# Altium PCB smartbox.PcbDoc
Units mm, origin at the board's own origin, x right, y up, seen from the top; angles counter-clockwise.
Board outline 93 x 55 mm, 2 copper layers (Top Layer, Bottom Layer); 91 components, 68 nets, 355 pads, 255 vias.
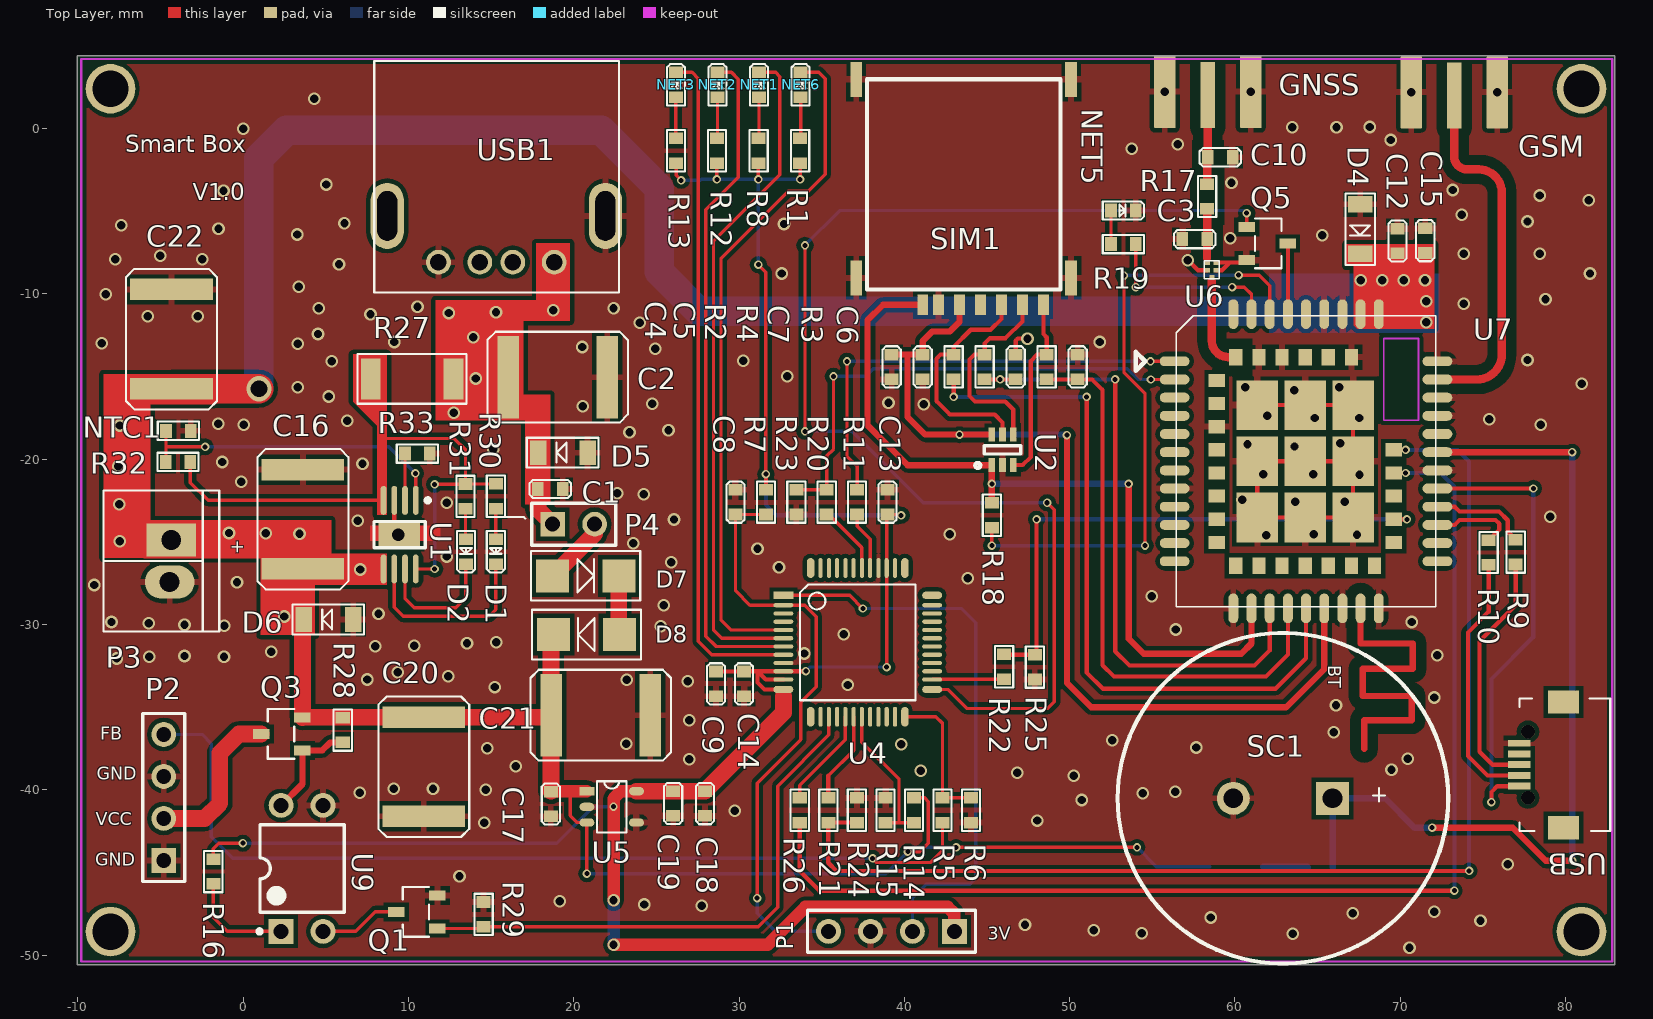
[diagram p0: Top Layer view]
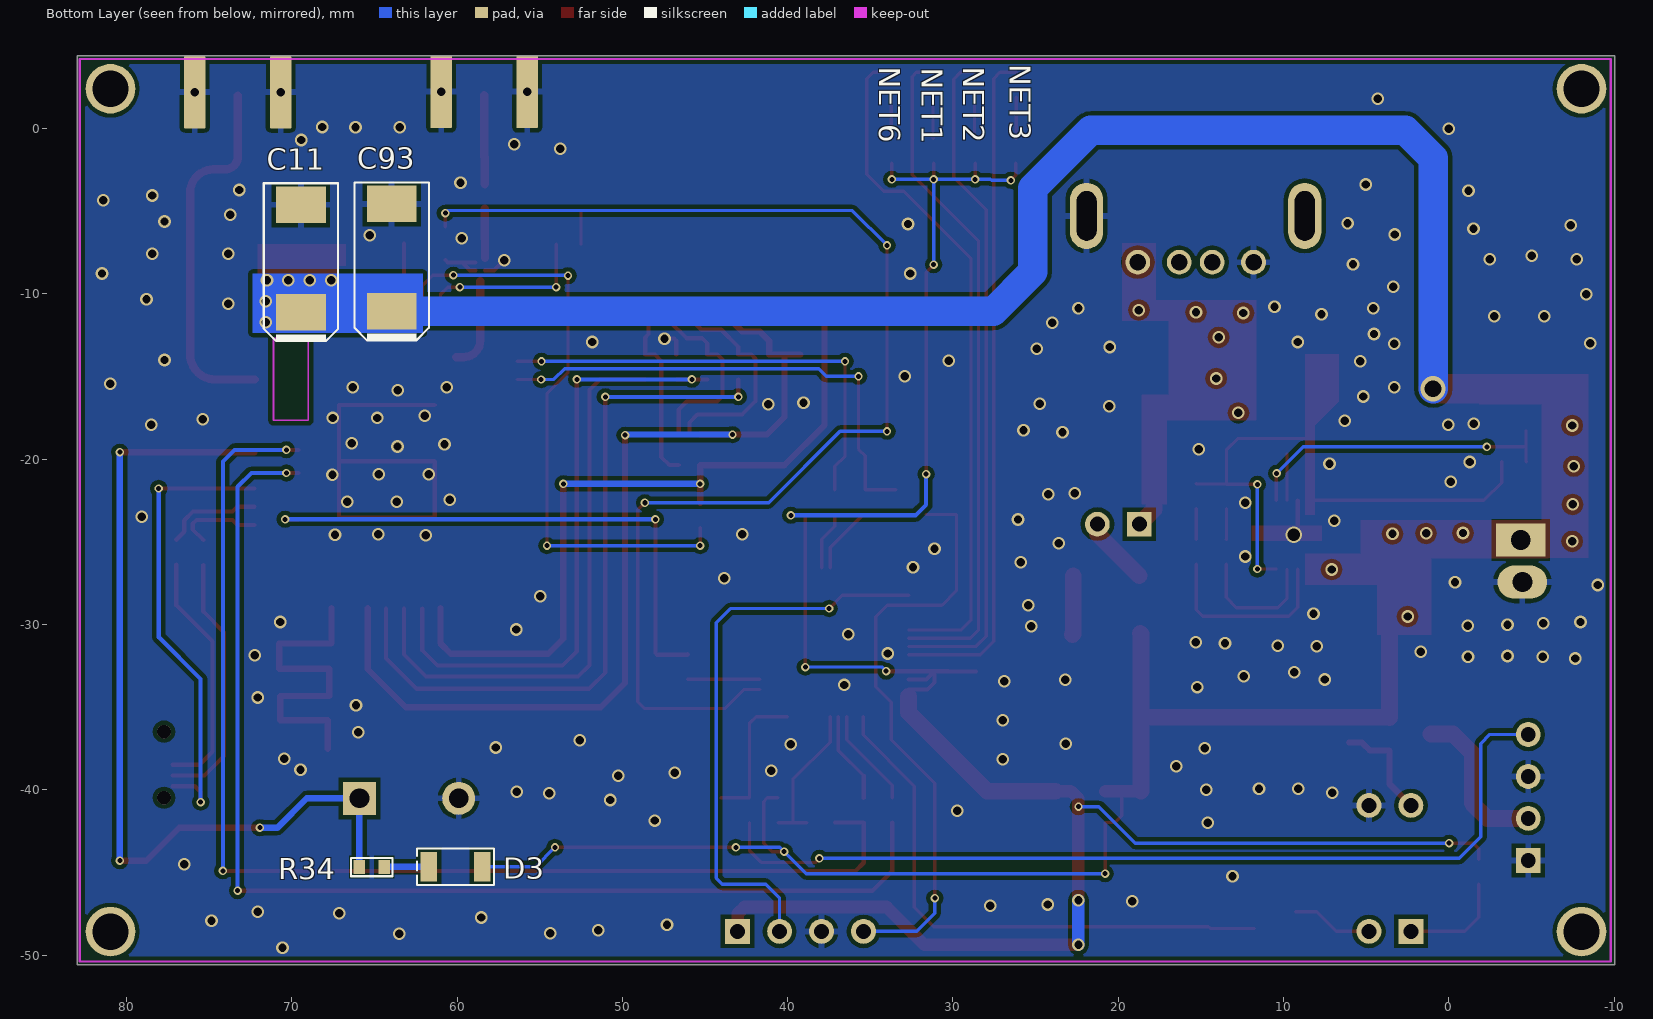
[diagram p1: Bottom Layer view, seen from below]

## Layer stack, top to bottom
Top Layer: signal copper 0.0356
Dielectric: dielectric 0.32, FR-4, Dk 4.8
Bottom Layer: signal copper 0.0356

## Board outline
-10.033,-50.58 82.967,-50.58 82.967,4.42 -10.033,4.42

## Design rules (kind name [scope] priority, off if disabled: settings)
Clearance GND [All vs InNetClass('RF')] p1: gap=0.635
Clearance [All] p2: gap=0.254
DiffPairsRouting [All] p1: maxlimit=0.254 minlimit=0.254 mostfreqgap=0.254 maxuncoupledlength=12.7
PolygonConnect [All] p1: connectstyle=Relief reliefconductorwidth=0.381 reliefentries=4 polygonreliefangle="90 Angle"
RoutingVias [All] p1: holewidth=0.711 width=1.27 viastyle="Through Hole" minholewidth=0.711 minwidth=1.27 maxholewidth=0.711 maxwidth=1.27
SilkscreenOverComponentPads [All] p1: minsilkscreentomaskgap=0.025
SolderMaskExpansion [All] p1: expansion=0.102
Width [All] p1: maxlimit=5.08 minlimit=0.203 preferedwidth=0.254
26 further rules are at their usual default settings.

## Classes and differential pairs
net class RF: BT_ANT GSM_ANT NetC3_1 NetC10_1 NetU6_1
component class CPU: C8 C9 C13 C14 NET1 NET2 NET3 NET6 P1 R1 R5 R6 R7 R8 R12 R13 R14 R15 U4
component class GSM: C3 C4 C5 C6 C7 C10 C11 C12 C15 C93 D3 D4 GNSS GSM NET5 Q5 R2 R3 R4 R9 R10 R11 R17 R18 R19 R20 R21 R22 R23 R24 R25 R26 R34 SC1 SIM1 U2 U6 U7 USB
component class POWER: C1 C2 C16 C17 C18 C19 C20 C21 C22 D1 D2 D5 D6 D7 D8 J1 NTC1 P2 P3 P4 Q1 Q3 R16 R27 R28 R29 R30 R31 R32 R33 U1 U5 U9 USB1
differential pair D: +D_P -D_N

## Components (designator, comment, footprint, x,y, rotation, side; value= is the part's Value field where it differs from the comment)
C1 "0.1uF/10V" 0603C 19.329,-21.793 r180 top
C2 "47uF/10V" 2220C 22.022,-15.037 r180 top
C3 "NC" 0603C 58.318,-6.68 r180 top
C4 "220nF/10V" 0603C 39.232,-15.165 r90 top
C5 "33pF/10V" 0603C 41.107,-15.165 r90 top
C6 "22pF/10V" 0603C 50.484,-15.165 r90 top
C7 "22pF/10V" 0603C 46.733,-15.165 r90 top
C8 "0.1uF/10V" 0603C 29.783,-23.343 r90 top
C9 "0.1uF/10V" 0603C 28.6,-32.842 r270 top
C10 "NC" 0603C 58.358,-1.727 r0 top
C11 "1000uF/6.3V" 7343 69.444,-11.1 r90 bottom
C12 "33pF/10V" 0603C 69.839,-7.544 r90 top
C13 "0.1uF/10V" 0603C 38.978,-23.343 r90 top
C14 "10uF/10V" 0603C 30.291,-34.341 r90 top
C15 "10pF/10V" 0603C 71.515,-7.518 r90 top
C16 "47uF/10V" 2220C 3.607,-20.625 r270 top
C17 "0.1uF/10V" 0603C 18.607,-40.107 r270 top
C18 "0.1uF/10V" 0603C 27.94,-40.081 r270 top
C19 "10uF/10V" 0603C 26.01,-41.58 r90 top
C20 "47uF/10V" 2220C 10.922,-41.605 r90 top
C21 "47uF/10V" 2220C 24.627,-35.484 r180 top
C22 "47uF/10V" 2220C -4.343,-9.728 r270 top
C93 "1000uF/6.3V" 7343 63.957,-11.049 r90 bottom
D1 "" 0603LED 15.28,-24.841 r270 top
D2 "" 0603LED 13.471,-24.85 r270 top
D3 "1N4148" LL34 58.471,-44.653 r0 bottom
D4 "MMSZ5231BT1G" SOD123 67.578,-4.572 r270 top
D5 "MMSZ5231BT1G" SOD123 20.835,-19.6 r180 top
D6 "MMSZ5231BT1G" SOD123 6.655,-29.693 r180 top
D7 "SS24" SMA 18.72,-27.051 r0 top
D8 "SS24" SMA 22.758,-30.607 r180 top
GNSS "SMA/142-0711-821" "SMA END LAUNCH JACK RECEPTACLE SHORT" 58.358,2.032 r0 top
GSM "SMA/142-0711-821" "SMA END LAUNCH JACK RECEPTACLE SHORT" 73.268,2.007 r0 top
NET1 "LED" 0603LED 31.205,1.905 r90 top
NET2 "LED" 0603LED 28.691,1.905 r90 top
NET3 "LED" 0603LED 26.176,1.905 r90 top
NET5 "LED" 0603LED 52.502,-4.953 r0 top
NET6 "LED" 0603LED 33.72,1.905 r90 top
NTC1 "SDN1608X103F3950FTF" 0603R -4.674,-18.277 r0 top
P1 "Header 4" HDR1X4 43.028,-48.565 r180 top
P2 "Header 4" HDR1X4 -4.812,-44.272 r90 top
P3 "Header 2" 2X2.54MMZ -4.355,-24.892 r270 top
P4 "JUMPER" HDR1X2 18.72,-23.927 r0 top
Q1 "S8050" SOT23-3 11.749,-48.387 r0 top
Q3 "SI2343" SOT23-3 3.581,-37.617 r0 top
Q5 "S8050" SOT23-3 60.706,-5.944 r180 top
R1 "1K" 0603r 33.695,-0.584 r270 top
R2 "10R/5%" 0603R 42.983,-13.665 r270 top
R3 "10R/5%" 0603R 48.609,-13.665 r270 top
R4 "10R/5%" 0603R 44.858,-13.665 r270 top
R5 "20K" 0603R 42.305,-41.986 r90 top
R6 "130K" 0603R 44.032,-40.486 r270 top
R7 "10K" 0603R 31.622,-23.343 r90 top
R8 "1K" 0603r 31.18,-0.584 r270 top
R9 "10R/5%" 0603R 76.987,-24.867 r270 top
R10 "10R/5%" 0603R 75.351,-24.892 r270 top
R11 "1K" 0603R 37.139,-21.843 r270 top
R12 "1K" 0603r 28.665,-0.584 r270 top
R13 "1K" 0603r 26.187,-0.584 r270 top
R14 "10K" 0603R 40.578,-40.486 r270 top
R15 "10K" 0603R 38.851,-41.986 r90 top
R16 "10K" 0603R -1.815,-45.695 r90 top
R17 "0" 0603R 58.318,-4.851 r90 top
R18 "10K" 0603R 45.288,-22.631 r270 top
R19 "1K" 0603r 52.502,-6.985 r0 top
R20 "10K" 0603R 35.3,-23.343 r90 top
R21 "10K" 0603R 35.396,-40.486 r270 top
R22 "10K" 0603R 46.039,-33.299 r90 top
R23 "140K" 0603R 33.461,-21.843 r270 top
R24 "140K" 0603R 37.124,-41.986 r90 top
R25 "140K" 0603R 47.893,-31.826 r270 top
R26 "1K" 0603R 33.669,-41.986 r90 top
R27 "0.4/3/4W" 2010R 12.714,-15.138 r180 top
R28 "10K" 0603R 6.02,-37.135 r90 top
R29 "10K" 0603R 14.543,-46.787 r270 top
R30 "1K" 0603R 15.28,-22.987 r90 top
R31 "1K" 0603R 13.445,-22.995 r90 top
R32 "5.7K/1%" 0603R -3.2,-20.156 r180 top
R33 "2K/1%" 0603R 11.284,-19.66 r180 top
R34 "10R/5%" 0603r 65.913,-44.679 r180 bottom
SC1 "4.7F/5.5V" SF-13.5*6.5 65.902,-40.513 r180 top
SIM1 "nano sim" "Nano SIM" 41.111,-10.643 r180 top
U1 "TP4056-42-MSOP8-PP" SOP65P490X265-8N 9.463,-24.562 r270 top
U2 "SMF05C" SC70-6L 45.937,-19.431 r90 top
U4 "STM8L151C8T6" TQFP-48 32.679,-28.829 r0 top
U5 "TLV70230DBVR" SOT23-5(DBV) 20.791,-40.081 r0 top
U6 "SAFFB1G56KB0F0A" SAFFB1G56KB0F0A 58.598,-8.992 r90 top
U7 "SIM868E/SIM68" SIM868 56.351,-14.072 r0 top
U9 "TL181" DIP-4 3.556,-44.755 r90 top
USB "Header 5" Micro_USB_PH 77.205,-38.481 r180 top
USB1 "Header 5" USB-A 18.81,-8.077 r180 top

## Footprints (in the part's own frame and the unit in brackets; to place one, negate y for a bottom-side part, rotate by r counter-clockwise, add the part's x,y. Pads: shape width x height; smd on the part's side, far side on the other; paste and mask are expansions set on the pad)
2X2.54MMZ [mm]
  rect 2x3 hole 1.2: 1(0,0)
  oval 2x3 hole 1.2: 2(2.54,-0.1)
  silkscreen extent -3,-4.1 5.54,2.9
0603C [mm]
  rect 0.7x0.85 smd: 1(0,0) 2(1.5,0)
  silkscreen extent -0.5,-0.55 2,0.55
0603LED [mm]
  rect 0.7x0.85 smd: 1(0,0) 2(1.5,0)
  silkscreen extent -0.5,-0.55 2,0.55
0603R [mm]
  rect 0.7x0.85 smd: 1(0,0) 2(1.5,0)
  silkscreen extent -0.5,-0.55 2,0.55
0603r [mm]
  rect 0.7x0.85 smd: 1(0,0) 2(1.5,0)
  silkscreen extent -0.5,-0.55 2,0.55
2010R [mm]
  rect 1.2x2.5 smd: 1(0,0) 2(5,0)
  silkscreen extent -0.8,-1.5 5.8,1.5
2220C [mm] "C"
  rect 1.3x5 smd: 1(0,0) 2(6,0)
  silkscreen extent -1.25,-2.75 7.25,2.75
7343 [mm]
  rect 2.2x3 smd: 1(0,0) 2(6.5,0)
  silkscreen extent -1.75,-2.25 7.8,2.25
DIP-4 [mm] "DIP; 4 Leads; Row Spacing 7.62 mm; Pitch 2.54 mm"
  rect 1.5x1.5 hole 0.9: 1(-3.81,1.27)
  round 1.5 hole 0.9: 2(-3.81,-1.27) 3(3.81,-1.27) 4(3.81,1.27)
  silkscreen extent -3.93,-2.55 2.65,2.69, body extent -3.15,-2.5 3.15,2.5, height 5.6
HDR1X2 [mm] "Connector; Header; 2 Position"
  rect 1.5x1.5 hole 0.9: 1(0,0)
  round 1.5 hole 0.9: 2(2.54,0)
  silkscreen extent -1.27,-1.27 3.81,1.27
HDR1X4 [mm] "Connector; Header; 4 Position"
  rect 1.5x1.5 hole 0.9: 1(0,0)
  round 1.5 hole 0.9: 2(2.54,0) 3(5.08,0) 4(7.62,0)
  silkscreen extent -1.27,-1.27 8.89,1.27
LL34 [mm]
  rect 1x1.8 smd: 1(0,0) 2(3.25,0)
  silkscreen extent -0.7,-1.1 3.96,1.1
Micro_USB_PH [mm]
  rect 1.35x0.42 smd: 1(0,1.3) 2(0,0.65) 3(0,0) 4(0,-0.65) 5(0,-1.3)
  rect 1.9x1.4 smd: 6(-2.675,3.811) 9(-2.675,-3.789)
  round 0.82 hole 0.82 unplated: 7(-0.525,2) 8(-0.525,-2)
  silkscreen extent -5.5,-4 0,4.01
"Nano SIM" [mm]
  rect 0.7x2.1 smd: 0(-8.97,-1.615) 0(-8.97,-13.615) 0(4.02,-1.615) 0(4.02,-13.615)
  rect 0.65x1.23 smd: 1(-2.22,0) 2(-4.76,0) 3(-7.3,0) 5(-0.95,0) 6(-3.49,0) 7(-6.03,0) 8(0,0)
  silkscreen extent -8.33,-13.64 3.38,-0.91
SAFFB1G56KB0F0A [mm]
  rect 0.3x0.3 smd: 1(0,0)
  rect 0.25x0.35 smd: 2(0.425,-0.288) 5(0.425,0.288)
  rect 0.3x0.35 smd: 3(0.9,-0.288) 4(0.9,0.288)
  silkscreen extent -0.1,-0.44 1,0.46
SC70-6L [mm]
  rect 0.85x0.4 smd: 1(-0.925,0.65) 2(-0.925,0) 3(-0.925,-0.65) 4(0.925,-0.65) 5(0.925,0) 6(0.925,0.65)
  silkscreen extent -1.09,-1.1 0.25,1.65
SF-13.5*6.5 [mm]
  rect 2x2 hole 1.2: 1(0,0)
  round 2 hole 1.2: 2(6,0)
  silkscreen extent -7,-10 13,10
SIM868 [mm]
  oval 1.8x0.6 smd: 1(0,0) 2(0,-1.1) 3(0,-2.2) 4(0,-3.3) 5(0,-4.4) 6(0,-5.5) 7(0,-6.6) 8(0,-7.7) 9(0,-8.8) 10(0,-9.9) 11(0,-11) 12(0,-12.1) 22(15.9,-12.1) 23(15.9,-11) 24(15.9,-9.9) 25(15.9,-8.8) 26(15.9,-7.7) 27(15.9,-6.6) 28(15.9,-5.5) 29(15.9,-4.4) 30(15.9,-3.3) 31(15.9,-2.2) 32(15.9,-1.1) 33(15.9,0)
  oval 0.6x1.8 smd: 13(3.55,-14.95) 14(4.65,-14.95) 15(5.75,-14.95) 16(6.85,-14.95) 17(7.95,-14.95) 18(9.05,-14.95) 19(10.15,-14.95) 20(11.25,-14.95) 21(12.35,-14.95) 34(12.35,2.85) 35(11.25,2.85) 36(10.15,2.85) 37(9.05,2.85) 38(7.95,2.85) 39(6.85,2.85) 40(5.75,2.85) 41(4.65,2.85) 42(3.55,2.85)
  rect 1x0.8 smd: 43(2.549,-1.159) 44(2.549,-2.559) 45(2.549,-3.959) 46(2.549,-5.359) 47(2.549,-6.759) 48(2.549,-8.159) 49(2.549,-9.559) 50(2.549,-10.959) 58(13.251,-10.959) 59(13.251,-9.559) 60(13.251,-8.159) 61(13.251,-6.759) 62(13.251,-5.359)
  rect 0.8x1 smd: 51(3.7,-12.359) 52(5.1,-12.359) 53(6.5,-12.359) 54(7.9,-12.359) 55(9.3,-12.359) 56(10.7,-12.359) 57(12.1,-12.359) 63(10.7,0.25) 64(9.3,0.25) 65(7.9,0.25) 66(6.5,0.25) 67(5.1,0.25) 68(3.7,0.25)
  rect 2.5x3 smd: 69(5,-2.65) 70(5,-6.05) 71(5,-9.45) 72(7.9,-9.45) 73(10.8,-9.45) 74(10.8,-6.05) 75(10.8,-2.65) 76(7.9,-2.65) 77(7.9,-6.05)
  Keep-Out Layer lines w0.102: 12.65,-3.57 12.65,1.38 14.75,1.38 14.75,-3.57 12.65,-3.57
  silkscreen extent -2.35,-14.85 15.8,2.75
SMA [mm]
  rect 2x2 smd: 1(0,0) 2(4,0)
  silkscreen extent -1.3,-1.5 5.3,1.5
"SMA END LAUNCH JACK RECEPTACLE SHORT" [mm] "SMA Connector - End Launch Jack Receptacle - Short"
  rrect10% 0.9x4 smd paste+0 mask+0.05: 1(0,0)
  rrect10% 1.3x4.4 hole 0.5 mask+0.05: 2(-2.6,0.2) 2(2.6,0.2)
  body extent -0.5,-2.05 0.5,2.05, height 8
SOD123 [mm]
  rect 1x1.5 smd: A(0,0) K(3,0)
  silkscreen extent -0.65,-0.9 3.68,0.9
SOP65P490X265-8N [mm] "SOP, 8-Leads, Body 3.1x3.1mm (max), Pitch 0.65mm, IPC Medium Density"
  oval 1.75x0.35 smd: 1(-2.075,0.975) 2(-2.075,0.325) 3(-2.075,-0.325) 4(-2.075,-0.975) 5(2.075,-0.975) 6(2.075,-0.325) 7(2.075,0.325) 8(2.075,0.975)
  rect 1.5x2.5 smd paste+0: 9(0,-0.025)
  silkscreen extent -2.2,-1.55 0.8,1.83, body extent -1.55,-1.55 1.55,1.55, height 2.65
SOT23-3 [mm]
  rect 1x0.6 smd: 1(0,0) 2(0,2) 3(-2.5,1)
  silkscreen extent -2.1,-0.5 -0.5,2.5
SOT23-5(DBV) [mm]
  rect 0.9x0.5 smd: 1(0,0)
  oval 0.9x0.5 smd: 2(0,-0.95) 3(0,-1.9) 4(3,-1.9) 5(3,0)
  silkscreen extent 0.6,-2.5 2.4,0.6
TQFP-48 [mm]
  rect 1.2x0.45 smd: 1(0,0.6)
  oval 1.2x0.25 smd: 2(0,0) 3(0,-0.5) 4(0,-1) 5(0,-1.5) 6(0,-2) 7(0,-2.5) 8(0,-3) 9(0,-3.5) 10(0,-4) 11(0,-4.5) 26(9,-4.5) 27(9,-4) 28(9,-3.5) 29(9,-3) 30(9,-2.5) 31(9,-2) 32(9,-1.5) 33(9,-1) 34(9,-0.5) 35(9,0)
  oval 1.2x0.45 smd: 12(0,-5.1) 25(9,-5.1) 36(9,0.6)
  oval 0.45x1.2 smd: 13(1.65,-6.75) 24(7.35,-6.75) 37(7.35,2.25) 48(1.65,2.25)
  oval 0.25x1.2 smd: 14(2.25,-6.75) 15(2.75,-6.75) 16(3.25,-6.75) 17(3.75,-6.75) 18(4.25,-6.75) 19(4.75,-6.75) 20(5.25,-6.75) 21(5.75,-6.75) 22(6.25,-6.75) 23(6.75,-6.75) 38(6.75,2.25) 39(6.25,2.25) 40(5.75,2.25) 41(5.25,2.25) 42(4.75,2.25) 43(4.25,2.25) 44(3.75,2.25) 45(3.25,2.25) 46(2.75,2.25) 47(2.25,2.25)
  silkscreen extent 1,-5.75 8,1.25
USB-A [mm]
  round 1.5 hole 1: 1(0,0) 2(2.5,0) 3(4.5,0) 4(7,0)
  oval 2x4 hole 1.2 slot 3 at 90 deg: 5(-3.1,-2.8) 6(10.1,-2.8)
  silkscreen extent -3.91,-12.17 10.89,1.83

## Part data
C1 C2 C3 C4 C5 C6 C7 C8 C9 C10 C12 C13 C14 C15 C16 C17 C18 C19 C20 C21 C22: library part Cap, "Capacitor"
C11 C93: library part "Cap Pol1", "Polarized Capacitor (Radial)"
D1 D2: library part LED0, "Typical INFRARED GaAs LED"
D3 D7 D8: library part "Diode 1N4148", "High Conductance Fast Diode"
D4 D5 D6: library part "Diode 10TQ040", "Schottky Rectifier"
GNSS GSM: library part SMA, "SMA Straight Connector"
NET1 NET2 NET3 NET5 NET6: library part LED2, "Typical RED, GREEN, YELLOW, AMBER GaAs LED"
NTC1 R27 R30 R31 R32 R33: library part "Res Semi", "Semiconductor Resistor"
P1 P2: "Header, 4-Pin"
P3: "Header, 2-Pin"
P4: library part "Header 2", "Header, 2-Pin"
Q1 Q5: library part NPN
Q3: library part BUK92150-55A, "BUK92150-55A"
R1 R8 R12 R13 R19 R34: library part R
R2 R3 R4 R5 R6 R11 R14 R15 R17 R18 R20 R21 R22 R23 R24 R25 R26: library part Res2, "Resistor"
R7 R16 R28 R29: library part R, "R"
R9 R10: library part Resistor, "Resistor SMD - IEC symbol version"
SC1: library part "Cap Pol2", "Polarized Capacitor (Axial)"
U1: library part TP4056
U6: library part SAFFB1G56KBOFA
U7: library part SIM868E/SIM868
U9: library part Optoisolator1, "4-Pin Phototransistor Optocoupler"
USB USB1: "Header, 5-Pin"

## Free pads (board coordinates)
  round 3 hole 2.2: 0(-8.033,-48.58) 0(-8.033,2.42) 0(80.967,-48.58) 0(80.967,2.42)

## Via types
v1: diameter 0.762, hole 0.508, Top Layer to Bottom Layer, tented both sides, 198 vias
v2: diameter 0.508, hole 0.305, Top Layer to Bottom Layer, tented both sides, 55 vias
v3: diameter 1.016, hole 0.762, Top Layer to Bottom Layer, tented both sides, 1 vias
v4: diameter 1.524, hole 1.016, Top Layer to Bottom Layer, tented both sides, 1 vias

## Nets (pads, with @x,y where several pads share a name; then routed paths per layer and width w, separated by ;. In a path a pad name is that pad's centre, name@x,y a point inside that pad or via, vN(x,y) a via of type N, cw(c..) or ccw(c..) an arc to the next point about the centre after c; other vN are vias at no path point)
BT_ANT: U7.20 | length 20.5
  Top Layer w0.381: U7.20 67.601,-31.152 70.752,-31.152 70.752,-32.678 67.728,-32.678 67.728,-34.329 70.676,-34.329 70.688,-34.341 70.688,-35.789 67.818,-35.789 67.818,-37.516
D_N: R10.1 U7.24 | length 5.2
  Top Layer w0.254: U7.24 73.293,-23.972 73.589,-23.676 75.771,-23.676 75.997,-23.901 75.997,-24.246 R10.1
D_P: R9.1 U7.25 | length 6
  Top Layer w0.254: U7.25 73.293,-22.872 73.589,-23.168 75.981,-23.168 76.505,-23.691 76.505,-24.384 R9.1
FEED: P2.4 R5.1 | length 55.6
  Top Layer w0.203: v2(38.075,-44.145) 38.329,-44.399 41.58,-44.399 42.305,-43.674 42.305,-43.013 R5.1
  Bottom Layer w0.203: P2.4 -2.489,-36.652 -1.93,-37.211 -1.93,-42.85 -0.635,-44.145 v2(38.075,-44.145)
GND: C1.1 C2.1 C3.2 C4.1 C5.1 C6.2 C7.2 C8.2 C9.2 C10.2 C11.2 C12.2 C13.2 C14.1 C15.2 C16.1 C17.2 C18.2 C19.1 C20.1 C21.1 C22.1 C93.2 D4.A D5.A D6.A GNSS.2 GSM.2 NET5.2 NTC1.2 P1.3 P2.1 P2.3 P3.2 Q1.2 Q5.2 R6.2 R15.2 R23.2 R24.2 R25.2 R29.1 R33.1 SC1.2 SIM1.0 SIM1.5 U1.3 U1.9 U2.2 U4.9 U4.40 U5.2 U5.4 U6.2 U6.3 U6.5 U7.8 U7.13 U7.19 U7.21 U7.27 U7.30 U7.31 U7.33 U7.36 U7.37 U7.45 U7.63 U7.66 U7.67 U7.69 U7.70 U7.71 U7.72 U7.73 U7.74 U7.75 U7.76 U7.77 U9.3 USB1.4 USB1.5 USB.5 | length 35.7
  Top Layer w0.254: U1.3 9.138,-24.263 U1.9 ; C7.2 46.733,-12.83 46.863,-12.7 v1(47.447,-12.7) ; v1(57.15,-7.95) 57.766,-8.567 U6.5 ; U6.2 59.215,-8.567 59.69,-8.092 ; U6.3 59.69,-8.092 ; Q5.2 60.558,-8.092 59.69,-8.092 ; U7.69 U7.76 U7.75 U7.74 ; U7.74 U7.77 U7.70 U7.71 U7.72 U7.73 U7.74
  other v1: 70.561,-49.555 63.5,-48.717 54.356,-48.666 51.46,-48.489 47.295,-48.158 74.854,-47.93 58.547,-47.727 67.132,-47.473 72.06,-47.371 27.737,-47.015 24.257,-46.939 19.152,-46.736 13.081,-45.237 76.505,-44.501 14.58,-41.986 48.031,-41.859 29.743,-41.275 50.724,-40.615 54.432,-40.208 7.036,-40.183 56.388,-40.107 14.681,-40.005 9.093,-39.929 11.481,-39.929 50.241,-39.141 46.838,-38.964 40.996,-38.837 69.469,-38.786 16.485,-38.583 26.975,-38.151 70.46,-38.125 14.757,-37.49 57.658,-37.44 39.802,-37.236 23.165,-37.211 52.578,-37.008 65.989,-36.525 26.975,-35.789 66.116,-34.874 72.06,-34.417 15.215,-33.782 36.576,-33.655 26.899,-33.426 23.19,-33.35 7.493,-33.325 12.395,-33.122 9.347,-32.893 -7.645,-32.055 -5.69,-31.953 -1.168,-31.953 -3.556,-31.902 72.238,-31.852 33.934,-31.75 1.702,-31.648 7.976,-31.318 10.338,-31.293 13.538,-31.14 15.316,-31.064 36.322,-30.582 56.413,-30.302 25.248,-30.099 -1.143,-30.074 -3.556,-30.023 -5.715,-29.921 -7.976,-29.845 70.688,-29.845 8.179,-29.337 25.451,-28.829 54.966,-28.296 -9.017,-27.61 -0.381,-27.432 43.84,-27.203 32.41,-26.543 25.883,-26.238 12.319,-25.883 31.115,-25.425 23.597,-25.07 61.9,-24.587 67.386,-24.562 42.748,-24.536 64.77,-24.536 6.934,-23.724 26.06,-23.647 79.07,-23.47 12.319,-22.631 63.652,-22.581 66.65,-22.581 60.452,-22.454 24.232,-22.123 22.631,-22.047 -0.127,-21.361 67.539,-20.93 61.722,-20.904 64.745,-20.904 7.214,-20.269 -1.27,-20.168 15.113,-19.406 63.602,-19.228 60.757,-19.101 66.37,-19.025 23.368,-18.364 25.73,-18.237 0.025,-17.907 78.511,-17.907 -1.524,-17.856 6.299,-17.678 75.387,-17.577 64.821,-17.501 67.513,-17.501 61.951,-17.374 20.549,-16.789 41.173,-16.662 24.74,-16.637 39.04,-16.586 5.182,-16.205 63.576,-15.824 3.302,-15.646 60.63,-15.646 66.319,-15.646 80.975,-15.443 32.918,-14.986 5.359,-14.072 30.251,-14.046 77.699,-13.995 24.917,-13.31 20.498,-13.208 3.302,-13.005 -8.56,-12.979 9.144,-12.903 51.816,-12.903 4.521,-12.421 23.978,-11.735 -5.791,-11.354 -2.743,-11.354 7.696,-11.227 4.572,-10.871 22.403,-10.871 10.541,-10.77 73.838,-10.592 78.791,-10.312 -8.331,-10.008 3.353,-9.55 32.588,-8.763 81.483,-8.763 5.791,-8.204 -7.747,-7.899 -2.489,-7.899 -5.029,-7.696 73.838,-7.569 78.435,-7.569 59.715,-6.629 65.278,-6.452 3.277,-6.401 -1.499,-6.045 -7.391,-5.842 32.715,-5.766 6.121,-5.715 77.699,-5.613 73.711,-5.207 81.407,-4.318 78.435,-4.039 -1.194,-3.759 73.177,-3.708 5.029,-3.378 59.792,-3.277 53.746,-1.219 56.54,-0.94 69.418,-0.686 0,0 63.475,0.076 66.142,0.076 68.148,0.102 4.293,1.803
  other v3: 9.373,-24.562
GNSS_EN: R22.2 R25.1 U7.59 | length 33.3
  Top Layer w0.254: R22.2 46.066,-31.826 R25.1 47.997,-31.722 v2(47.997,-23.631) ; U7.59 v2(70.4,-23.631)
  Bottom Layer w0.254: v2(47.997,-23.631) v2(70.4,-23.631)
GNSS_EN_IN: R22.1 U4.26 | length 4.4
  Top Layer w0.203: U4.26 41.698,-33.31 46.029,-33.31 R22.1
GNSS_RXD: R21.2 R24.1 U7.62 | length 72.8
  Top Layer w0.254: R24.1 R21.2 35.396,-44.413 35.89,-44.907 38.684,-44.907 v2(74.168,-44.907) ; U7.62 v2(70.332,-19.431)
  Bottom Layer w0.254: v2(70.332,-19.431) 73.457,-19.431 74.168,-20.142 v2(74.168,-44.907)
GNSS_TXD: R26.1 U7.61 | length 71.5
  Top Layer w0.254: R26.1 33.669,-44.921 34.849,-46.101 v2(73.279,-46.101) ; U7.61 v2(70.33,-20.831)
  Bottom Layer w0.254: v2(70.33,-20.831) 72.444,-20.831 73.279,-21.666 v2(73.279,-46.101)
GSM_ANT: GSM.1 U7.32 | length 22.4
  Top Layer w0.508: U7.32 74.633,-15.172 ccw(c74.633,-13.655) 76.149,-13.655 76.149,-3.861 ccw(c74.752,-3.861) 74.752,-2.464 74.041,-2.464 cw(c74.041,-1.691) 73.268,-1.691 GSM.1
GSM_RXD: R20.2 R23.1 U7.2 | length 30
  Top Layer w0.203: R23.1 R20.2 35.3,-19.793 35.712,-19.38 v2(35.712,-14.986) ; v2(54.907,-15.172) U7.2
  Bottom Layer w0.203: v2(35.712,-14.986) 37.668,-14.986 38.125,-14.529 53.492,-14.529 54.135,-15.172 v2(54.907,-15.172)
GSM_TXD: R11.1 U7.1 | length 27.9
  Top Layer w0.203: v2(36.525,-14.072) 36.525,-19.812 37.139,-20.426 R11.1 ; v2(54.889,-14.072) U7.1
  Bottom Layer w0.203: v2(36.525,-14.072) v2(54.889,-14.072)
LOCK_IO: Q1.1 R29.2 U4.15 | length 33.9
  Top Layer w0.203: Q1.1 14.443,-48.387 R29.2 31.164,-48.287 32.334,-47.117 32.334,-39.776 35.429,-36.682 U4.15
NetC3_1: C3.1 R17.1 U6.4 | length 3
  Top Layer w0.508: 58.31,-7.823 58.31,-6.688 C3.1 R17.1
NetC10_1: C10.1 GNSS.1 R17.2 | length 5.4
  Top Layer w0.508: R17.2 58.318,-1.767 cw(c58.358,-1.767) C10.1 GNSS.1
NetD1_1: D1.1 R30.1 | length 1.9
  Top Layer w0.203: D1.1 R30.1
NetD1_2: D1.2 U1.6 | length 11.6
  Top Layer w0.203: U1.6 9.138,-28.95 9.677,-29.489 14.884,-29.489 15.28,-29.094 D1.2
NetD2_1: D2.1 R31.1 | length 1.9
  Top Layer w0.203: R31.1 13.445,-24.824 D2.1
NetD2_2: D2.2 U1.7 | length 8
  Top Layer w0.203: U1.7 9.788,-28.432 10.338,-28.981 12.852,-28.981 13.471,-28.363 D2.2
NetD3_2: D3.2 R34.2 | length 2.7
  Bottom Layer w0.381: D3.2 64.388,-44.653 R34.2
NetD7_1: D7.1 P4.2 | length 4.2
  Top Layer w1.016: D7.1 21.26,-24.511 P4.2
NetD7_2: D7.2 D8.1 | length 3.6
  Top Layer w1.016: D7.2 22.72,-30.568 D8.1
NetNET1_1: NET1.1 R8.1 | length 2.5
  Top Layer w0.203: R8.1 31.205,-0.559 NET1.1
NetNET1_2: NET1.2 U4.6 | length 40.9
  Top Layer w0.203: NET1.2 32.206,3.405 32.461,3.15 32.461,-2.794 30.683,-4.572 28.448,-6.807 28.448,-30.328 28.949,-30.829 U4.6
NetNET2_1: NET2.1 R12.1 | length 2.5
  Top Layer w0.203: R12.1 28.691,-0.559 NET2.1
NetNET2_2: NET2.2 U4.7 | length 40.9
  Top Layer w0.203: NET2.2 29.539,3.405 29.947,2.997 29.947,-2.946 27.991,-4.902 27.991,-5.359 27.991,-30.709 28.611,-31.329 U4.7
NetNET3_1: NET3.1 R13.1 | length 2.5
  Top Layer w0.203: NET3.1 26.176,-0.573 R13.1
NetNET3_2: NET3.2 U4.8 | length 41
  Top Layer w0.203: NET3.2 27.151,3.405 27.534,3.023 27.534,-29.693 27.534,-31.013 28.349,-31.829 U4.8
NetNET5_1: NET5.1 R19.1 | length 2
  Top Layer w0.203: R19.1 NET5.1
NetNET6_1: NET6.1 R1.1 | length 2.5
  Top Layer w0.203: R1.1 33.72,-0.559 NET6.1
NetNET6_2: NET6.2 U4.5 | length 41.7
  Top Layer w0.203: U4.5 29.491,-30.329 28.905,-29.743 28.905,-7.849 32.969,-3.785 33.604,-3.785 34.188,-3.785 35.204,-2.769 35.204,3.023 34.822,3.405 NET6.2
NetNTC1_1: NTC1.1 R32.2 U1.1 | length 19.3
  Top Layer w0.203: R32.2 -4.674,-20.13 -4.674,-19.253 ; NTC1.1 -4.674,-19.253 ; v2(-2.311,-19.253) -4.674,-19.253 ; v2(10.414,-20.853) 10.438,-20.877 U1.1
  Bottom Layer w0.203: v2(-2.311,-19.253) 8.814,-19.253 v2(10.414,-20.853)
NetP2_2: P2.2 Q3.3 | length 9.8
  Top Layer w1.016: P2.2 -2.337,-41.732 -1.422,-40.818 -1.422,-37.77 -0.27,-36.617 Q3.3
NetQ1_3: Q1.3 U9.2 | length 4.9
  Top Layer w0.203: U9.2 6.807,-48.565 7.985,-47.387 Q1.3
NetQ3_1: Q3.1 R28.1 U9.4 | length 6.5
  Top Layer w0.381: U9.4 3.581,-39.649 Q3.1 4.775,-37.617 5.258,-37.135 R28.1
NetR2_1: R2.1 SIM1.2 U2.5 | length 13.9
  Top Layer w0.254: SIM1.2 45.871,-11.507 45.212,-12.167 44.018,-12.167 42.983,-13.202 R2.1 42.189,-13.665 41.935,-13.919 41.935,-16.485 42.748,-17.297 45.466,-17.297 45.937,-17.769 U2.5
NetR3_1: R3.1 SIM1.3 U2.3 | length 11.3
  Top Layer w0.254: U2.3 47.157,-20.356 47.65,-19.863 47.65,-14.046 48.031,-13.665 R3.1 48.609,-12.617 48.411,-12.42 SIM1.3
NetR4_1: R4.1 SIM1.7 U2.4 | length 12.3
  Top Layer w0.254: U2.4 46.587,-16.996 46.101,-16.51 44.272,-16.51 43.942,-16.18 43.942,-13.97 44.247,-13.665 R4.1 44.858,-13.003 45.187,-12.675 46.126,-12.675 47.141,-11.66 SIM1.7
NetR5_2: R5.2 R6.1 U4.24 | length 8.7
  Top Layer w0.203: U4.24 41.904,-35.579 42.305,-35.981 R5.2 R6.1
NetR9_2: R9.2 USB.3 | length 15
  Top Layer w0.254: R9.2 76.987,-28.829 74.803,-31.013 74.803,-37.694 75.59,-38.481 USB.3
NetR10_2: R10.2 USB.2 | length 15.7
  Top Layer w0.254: R10.2 75.351,-29.221 74.092,-30.48 74.092,-37.948 75.275,-39.131 USB.2
NetR14_2: R14.2 R15.1 U4.19 | length 9.1
  Top Layer w0.203: U4.19 37.429,-37.119 39.675,-39.365 39.675,-41.986 ; R15.1 39.675,-41.986 ; R14.2 39.675,-41.986
NetR16_1: R16.1 U9.1 | length 6.5
  Top Layer w0.203: R16.1 -1.815,-47.715 -0.965,-48.565 U9.1
NetR19_2: R19.2 U7.41 | length 11.1
  Top Layer w0.203: v2(54.002,-9.588) R19.2 ; v2@59.919,-9.677 v2(59.83,-9.588) 60.566,-9.588 61.001,-10.024 U7.41
  Bottom Layer w0.203: v2(54.002,-9.588) v2(59.83,-9.588)
NetR27_2: R27.2 R30.2 R31.2 R32.1 U1.4 U1.8 | length 30.8
  Top Layer w0.203: R32.1 -3.2,-21.412 -2.125,-22.487 U1.4 ; 8.331,-18.745 12.776,-18.745 13.445,-19.414 R31.2 ; U1.8 v2(11.575,-26.637) ; v2(11.575,-21.521) 13.42,-21.521 R31.2 ; R30.2 15.271,-21.495 R31.2
  Bottom Layer w0.203: v2(11.575,-26.637) v2(11.575,-21.521)
NetR33_2: R33.2 U1.2 | length 2.8
  Top Layer w0.203: R33.2 9.788,-19.664 U1.2
NetR34_1: R34.1 SC1.1 U7.28 | length 53.1
  Top Layer w0.381: v2(71.933,-42.291) 76.81,-42.291 78.804,-44.286 v2(80.403,-44.286) ; U7.28 v2(80.403,-19.572)
  Bottom Layer w0.203: SC1.1 SC1.1@65.913,-40.524
  Bottom Layer w0.381: SC1.1 69.088,-40.513 70.866,-42.291 v2(71.933,-42.291) ; R34.1 SC1.1@65.913,-40.524 ; v2(80.403,-44.286) v2(80.403,-19.572)
NetU6_1: U6.1 U7.68 | length 5.6
  Top Layer w0.508: 58.598,-9.22 58.598,-12.827 ccw(c59.592,-12.827) 59.592,-13.822 U7.68
PWRKEY: Q5.3 U7.39 | length 4.3
  Top Layer w0.254: U7.39 63.201,-6.948 Q5.3
PWRKEY_IN: Q5.1 U4.25 | length 76.4
  Top Layer w0.203: v2(33.985,-18.313) v2(33.985,-7.061) ; U4.25 42.616,-33.929 43.764,-35.077 48.666,-35.077 49.073,-34.671 49.073,-23.063 v2(48.641,-22.631) ; Q5.1 v2(60.706,-5.105)
  Bottom Layer w0.203: v2(33.985,-18.313) 36.83,-18.313 41.148,-22.631 v2(48.641,-22.631) ; v2(33.985,-7.061) 36.093,-4.953 38.557,-4.953 60.554,-4.953 v2(60.706,-5.105)
RST: C8.1 P1.4 R7.1 U4.2 | length 36.2
  Top Layer w0.203: v2(31.09,-46.558) 31.09,-39.599 33.731,-36.957 33.731,-34.706 34.671,-33.766 34.671,-29.515 33.985,-28.829 U4.2 30.658,-28.829 29.783,-27.954 C8.1 R7.1
  Bottom Layer w0.203: v2(31.09,-46.558) 31.09,-47.46 32.194,-48.565 P1.4 P1.4@35.382,-48.539
SIMC_CLK: C6.1 R3.2 U7.16 | length 35.1
  Top Layer w0.254: R3.2 51.36,-15.165 51.994,-15.799 51.994,-28.361 51.994,-32.461 52.68,-33.147 61.874,-33.147 63.201,-31.82 U7.16
SIMC_DATA: C7.1 R4.2 U7.15 | length 39.5
  Top Layer w0.254: R4.2 v2(45.796,-15.165) C7.1 ; 52.754,-31.393 52.754,-30.734 ; v2(52.754,-15.165) 52.754,-30.734 ; 62.101,-31.167 62.101,-30.251 ; U7.15 62.101,-30.251 ; 52.754,-30.734 52.754,-31.622 53.619,-32.487 61.189,-32.487 62.101,-31.574 62.101,-30.251
  Bottom Layer w0.254: v2(45.796,-15.165) v2(52.754,-15.165)
SIMC_DET: R18.1 SIM1.8 U2.1 U7.14 | length 48.7
  Top Layer w0.381: SIM1.8 38.71,-10.643 37.77,-11.582 37.77,-17.932 40.193,-20.356 U2.1 v2(45.287,-21.488) R18.1 ; v2(53.569,-21.488) 53.569,-30.861 54.483,-31.775 55.397,-31.775 60.376,-31.775 61.001,-31.15 U7.14
  Bottom Layer w0.381: v2(45.287,-21.488) v2(53.569,-21.488)
SIMC_RST: R2.2 U7.17 | length 43.2
  Top Layer w0.254: v2(42.983,-16.225) R2.2 ; v2(51.029,-16.225) 51.029,-32.893 52.019,-33.884 62.459,-33.884 64.301,-32.041 U7.17
  Bottom Layer w0.254: v2(42.983,-16.225) v2(51.029,-16.225)
SWIM: P1.2 U4.1 | length 34.1
  Top Layer w0.203: U4.1 36.687,-28.229 v2(37.49,-29.032)
  Bottom Layer w0.203: v2(37.49,-29.032) 43.459,-29.032 44.323,-29.896 44.323,-45.339 43.946,-45.716 41.33,-45.716 40.488,-46.558 P1.2
UART1_RXD: R11.2 U4.41 | length 3.6
  Top Layer w0.203: R11.2 37.139,-24.052 37.929,-24.842 U4.41
UART1_TXD: R20.1 U4.42 | length 4.2
  Top Layer w0.203: R20.1 35.433,-23.343 37.429,-25.338 U4.42
UART2_RXD: R26.2 U4.17 | length 6.1
  Top Layer w0.203: R26.2 33.669,-39.737 36.429,-36.977 U4.17
UART2_TXD: R21.1 U4.18 | length 5.5
  Top Layer w0.203: 35.396,-39.153 36.929,-37.62 U4.18
  Top Layer w0.254: R21.1 35.396,-39.153
UART3_RXD: U4.48
UART3_TXD: U4.47
VBAT: C11.1 C12.1 C15.1 C16.2 C17.1 C20.2 C21.2 C22.2 C93.1 D3.1 D4.K D6.K D8.2 P3.1 Q3.2 R14.1 R28.2 U1.5 U5.1 U5.3 U7.34 U7.35 | length 172.8
  Top Layer w0.203: 19.787,-40.081 19.787,-41.554 20.213,-41.981 U5.3 v2(20.791,-45.074) ; v2(40.208,-43.742) 40.942,-43.742 41.453,-43.231 41.453,-40.716 41.223,-40.486 R14.1 ; v2(43.129,-43.485) v2(54.077,-43.485)
  Top Layer w0.762: C17.1 18.627,-40.087 18.632,-40.081 19.787,-40.081 U5.1
  Top Layer w1.016: Q3.2 Q3.2@3.581,-35.605 ; D6.K 3.581,-29.766 Q3.2@3.581,-35.605 ; C17.1@18.627,-40.087 C21.2 ; D8.2@18.658,-30.531 18.627,-30.562 C21.2 ; Q3.2@3.581,-35.605 C20.2 18.505,-35.605 C21.2
  Top Layer w1.778: C22.2 v4(0.945,-15.728)
  Bottom Layer w0.203: v2(20.791,-45.074) 38.876,-45.074 v2(40.208,-43.742) 40.465,-43.485 v2(43.129,-43.485) ; v2(54.077,-43.485) 55.245,-44.653 D3.1
  Bottom Layer w1.778: v4(0.945,-15.728) 0.945,-1.772 2.616,-0.102 21.666,-0.102 25.171,-3.607 25.171,-8.661 27.559,-11.049 C93.1
  other v1: 2.489,-29.515 7.087,-26.67 -7.468,-24.968 3.404,-24.511 1.372,-24.486 -0.864,-24.46 -7.493,-22.733 -7.569,-20.422 -7.468,-17.958 71.577,-11.709 71.577,-10.439 67.615,-9.169 68.91,-9.169 70.206,-9.169 71.501,-9.169
VBUS: U7.26 USB.1 | length 28.3
  Top Layer w0.254: U7.26 v2(78.05,-21.772) ; v2(75.514,-40.742) 75.514,-40.132 75.865,-39.781 USB.1
  Bottom Layer w0.254: v2(75.514,-40.742) 75.514,-33.299 78.05,-30.763 v2(78.05,-21.772)
VCC_3V: C9.1 C13.1 C14.2 C18.1 C19.2 P1.1 R1.2 R7.2 R8.2 R12.2 R13.2 R16.2 U4.10 U4.11 U4.12 U4.39 U5.5 | length 136.5
  Top Layer w0.203: R16.2 -1.815,-43.572 -1.473,-43.231 v2(-0.025,-43.231) ; U5.5@23.622,-40.081 U5.5 ; R13.2 26.187,-2.819 v2(26.492,-3.124) ; R12.2@28.653,-2.082 v2(28.653,-3.06) 28.69,-3.023 v2@28.69,-3.02 ; v2(31.168,-8.228) 31.622,-8.682 v2(31.622,-20.905) ; R8.2@31.168,-2.082 v2(31.168,-3.06) 31.204,-3.023 v2@31.204,-3.02 ; R1.2 v2(33.695,-3.062) 33.731,-3.026 v2@33.731,-3.023 ; v2(38.929,-32.572) U4.39 38.929,-23.392 C13.1 39.751,-23.343 v2(39.802,-23.393)
  Top Layer w0.254: C9.1 28.602,-32.841 C14.2 30.303,-32.829 31.115,-32.829 ; R7.2 v2(31.622,-20.905) ; U4.12 32.215,-33.929 31.541,-33.929 31.115,-33.503 31.115,-32.829 ; U4.11 31.615,-33.329 31.115,-32.829 ; v2(34.036,-32.817) 34.024,-32.829 U4.10 31.115,-32.829
  Top Layer w0.762: v1(22.403,-49.378) 31.725,-49.378 34.011,-47.092 42.621,-47.092 43.028,-47.498 P1.1 ; v1(22.403,-46.685) v2(22.403,-41.021) 22.403,-40.538 22.86,-40.081 U5.5@23.622,-40.081
  Top Layer w1.016: U5.5 C18.1 32.69,-35.331 32.69,-34.341
  Bottom Layer w0.203: v2(-0.025,-43.231) 18.964,-43.231 21.174,-41.021 v2(22.403,-41.021) ; v2(26.492,-3.124) 27.661,-3.124 27.725,-3.06 v2(28.653,-3.06) ; v2@28.589,-3.124 v2(28.653,-3.06) ; v2(31.168,-8.228) v2(31.168,-3.06) ; v2(33.695,-3.062) 33.692,-3.06 v2(31.168,-3.06) ; v2(34.036,-32.817) 34.28,-32.572 v2(38.929,-32.572) ; v2(28.653,-3.06) v2(31.168,-3.06)
  Bottom Layer w0.254: v2(31.622,-20.905) 31.622,-22.757 32.258,-23.393 v2(39.802,-23.393)
  Bottom Layer w0.762: v1(22.403,-49.378) v1(22.403,-46.685)
VDD_EXT: R18.2 U7.40 | length 38
  Top Layer w0.203: v2(45.288,-25.222) R18.2 ; v2@53.289,-8.865 53.289,-14.763 54.559,-16.033 v2(54.559,-25.222) ; v2(60.223,-8.865) 61.468,-8.865 62.101,-9.498 U7.40
  Bottom Layer w0.203: v2(45.288,-25.222) v2(54.559,-25.222) ; v2@53.315,-8.865 v2(60.223,-8.865)
  other v2: 53.289,-8.89
VSIM: C4.2 C5.2 SIM1.1 U2.6 U7.18 | length 58.8
  Top Layer w0.381: C4.2 40.183,-13.665 ; SIM1.1 43.331,-11.685 42.748,-12.268 41.681,-12.268 41.107,-12.842 C5.2 40.183,-13.665 ; U2.6 v2(43.332,-18.506) 41.264,-18.506 40.183,-17.424 40.183,-13.665 ; v2(49.835,-18.542) 49.835,-33.528 51.308,-35.001 63.094,-35.001 65.401,-32.693 U7.18
  Bottom Layer w0.381: v2(43.332,-18.506) 48.057,-18.506 ; 48.768,-18.506 48.057,-18.506 ; v2(49.835,-18.542) 49.799,-18.506 48.057,-18.506
VUSB_5V: C1.2 C2.2 D5.K P4.1 R27.1 USB1.1 | length 2.5
  Top Layer w1.016: C1.2 17.829,-23.036 P4.1
  other v1: 12.725,-17.196 14.072,-15.113 13.919,-12.624 12.421,-11.151 15.291,-11.1 18.745,-10.973
pads on no net: SIM1.6 U4.3 U4.4 U4.13 U4.14 U4.16 U4.20 U4.21 U4.22 U4.23 U4.27 U4.28 U4.29 U4.30 U4.31 U4.32 U4.33 U4.34 U4.35 U4.36 U4.37 U4.38 U4.43 U4.44 U4.45 U4.46 U7.3 U7.4 U7.5 U7.6 U7.7 U7.9 U7.10 U7.11 U7.12 U7.22 U7.23 U7.29 U7.38 U7.42 U7.43 U7.44 U7.46 U7.47 U7.48 U7.49 U7.50 U7.51 U7.52 U7.53 U7.54 U7.55 U7.56 U7.57 U7.58 U7.60 U7.64 U7.65 USB1.2 USB1.3 USB1.6 USB.4 USB.6 USB.7 USB.8 USB.9

## Polygon pours and split planes (outlines as drawn)
GND on Top Layer "Mid-Layer 1-No Net" (solid, remove dead copper): -10.693,5.182 -10.185,5.69 82.88,5.69 82.88,-50.47 84.506,-52.095 83.896,-51.486 -11.074,-51.486 -11.074,4.572 -9.881,5.766
GND on Bottom Layer "Mid-Layer 1-No Net" (solid, remove dead copper): -15.443,8.738 81.026,8.738 85.979,3.785 88.621,1.143 88.621,-49.225 86.081,-49.225 82.982,-52.324 82.804,-52.146 -12.827,-52.146 -12.827,-48.285 -15.164,-45.949 -12.725,-43.51 -12.725,8.839

## Keep-outs
Keep-Out Layer:
  lines w0.127: -9.804,-50.394 82.829,-50.394 82.829,4.216 -9.804,4.216 -9.804,-50.394

## Other copper
Top Layer:
  rectangle net GND: 7.663,-24.931 11.938,-24.003
  region net VBAT: -1.829,-14.859 -8.455,-14.859 -8.455,-25.959 -5.613,-25.959 -5.613,-16.662 -1.829,-16.662
  region net VBAT: 8.687,-25.73 8.687,-27.584 4.318,-27.584 4.318,-30.632 1.067,-30.632 1.067,-25.984 -6.02,-25.984 -6.02,-23.673 5.309,-23.698 5.309,-25.73
  region net NetR27_2: 8.687,-13.638 6.655,-13.638 6.655,-16.51 8.103,-17.958 8.103,-23.368 8.687,-23.368
  region net VUSB_5V: 19.761,-6.934 19.761,-11.633 16.942,-11.633 16.942,-16.104 18.567,-16.104 18.567,-22.733 17.069,-22.733 17.069,-17.628 11.633,-17.628 11.633,-10.389 17.729,-10.389 17.729,-6.934
  region net VBAT: 67.412,-12.116 72.06,-12.116 72.06,-6.985 66.726,-6.985 66.726,-8.306 67.158,-8.306 67.183,-8.331 67.183,-11.887
Bottom Layer:
  region net VBAT: 72.365,-8.763 72.365,-12.344 62.078,-12.344 62.078,-8.763

## Silkscreen, mask and mechanical layers (free items; w line width, h text height)
Top Overlay:
  lines w0.127: 15.83,-23.487 16.957,-23.487 17.061,-23.591
  text "Smart Box" at -7.137,-1.422 h1.02
  text "V1.0" at -3.048,-4.318 h1.02
  text "+" at -0.686,-24.867 h0.76 r270
  text "BT" at 65.634,-32.461 h0.76 r270
  text "FB" at -8.661,-36.957 h0.76
  text "GND" at -8.865,-39.395 h0.76
  text "VCC" at -8.941,-42.139 h0.76
  text "GND" at -8.966,-44.602 h0.76
  text "3V" at 45.034,-49.073 h0.76
Mechanical 1:
  the board outline again, w0.127